# Altium PCB 采集主板V1.1_ZM_20210713.PcbDoc (part 1 of 2)
Units mm, origin at the board's own origin, x right, y up, seen from the top; angles counter-clockwise.
Board outline 130 x 65 mm, 4 copper layers (Top Layer, GND, Power, Bottom Layer), stack 0.778 mm thick; 185 components, 114 nets, 544 pads, 485 vias.
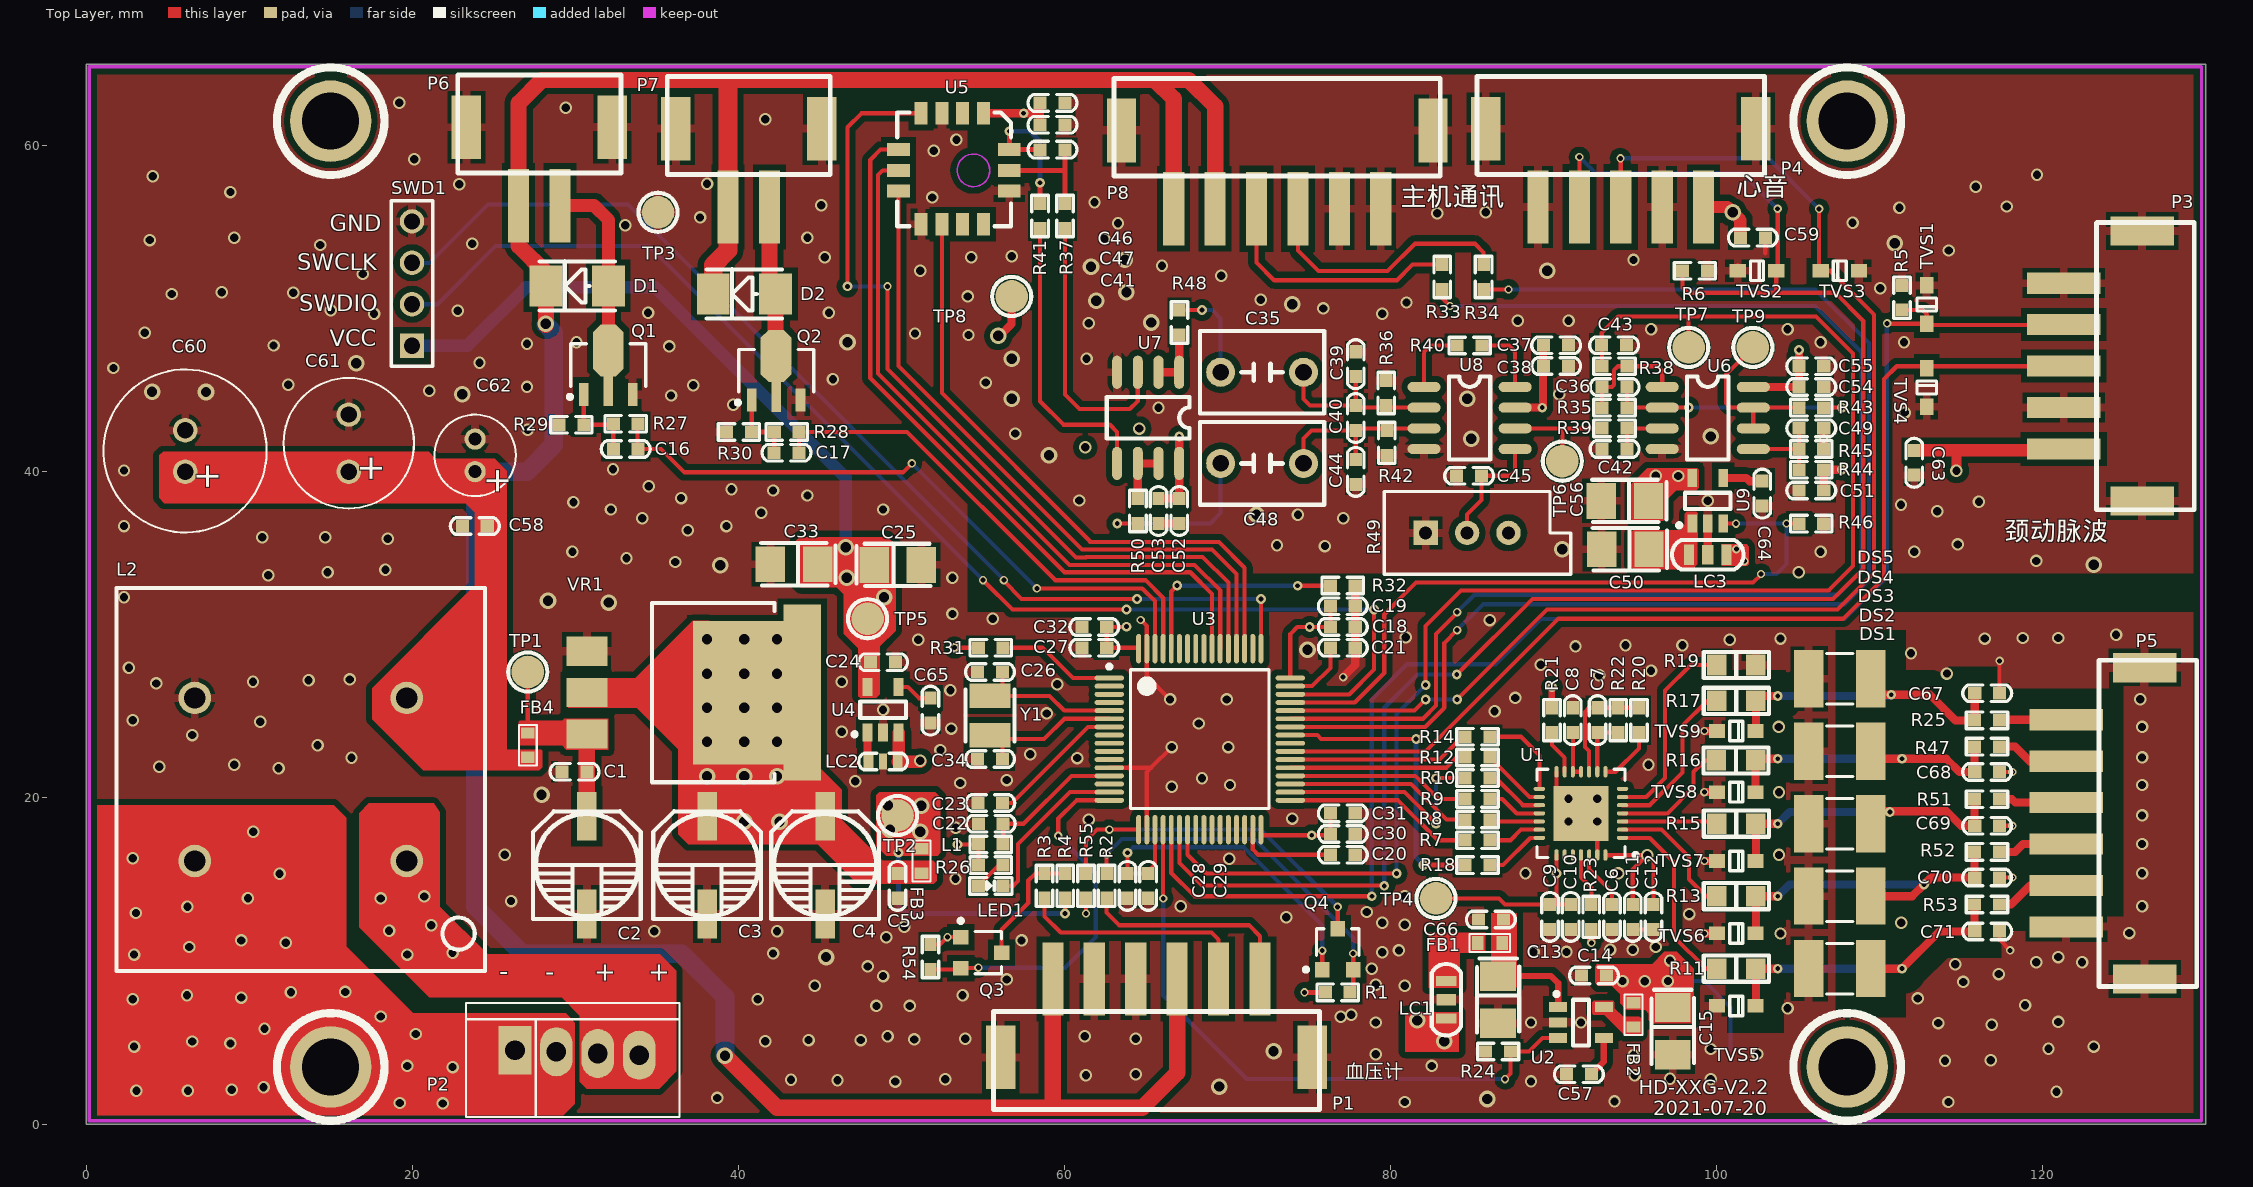
[diagram p0: Top Layer view]
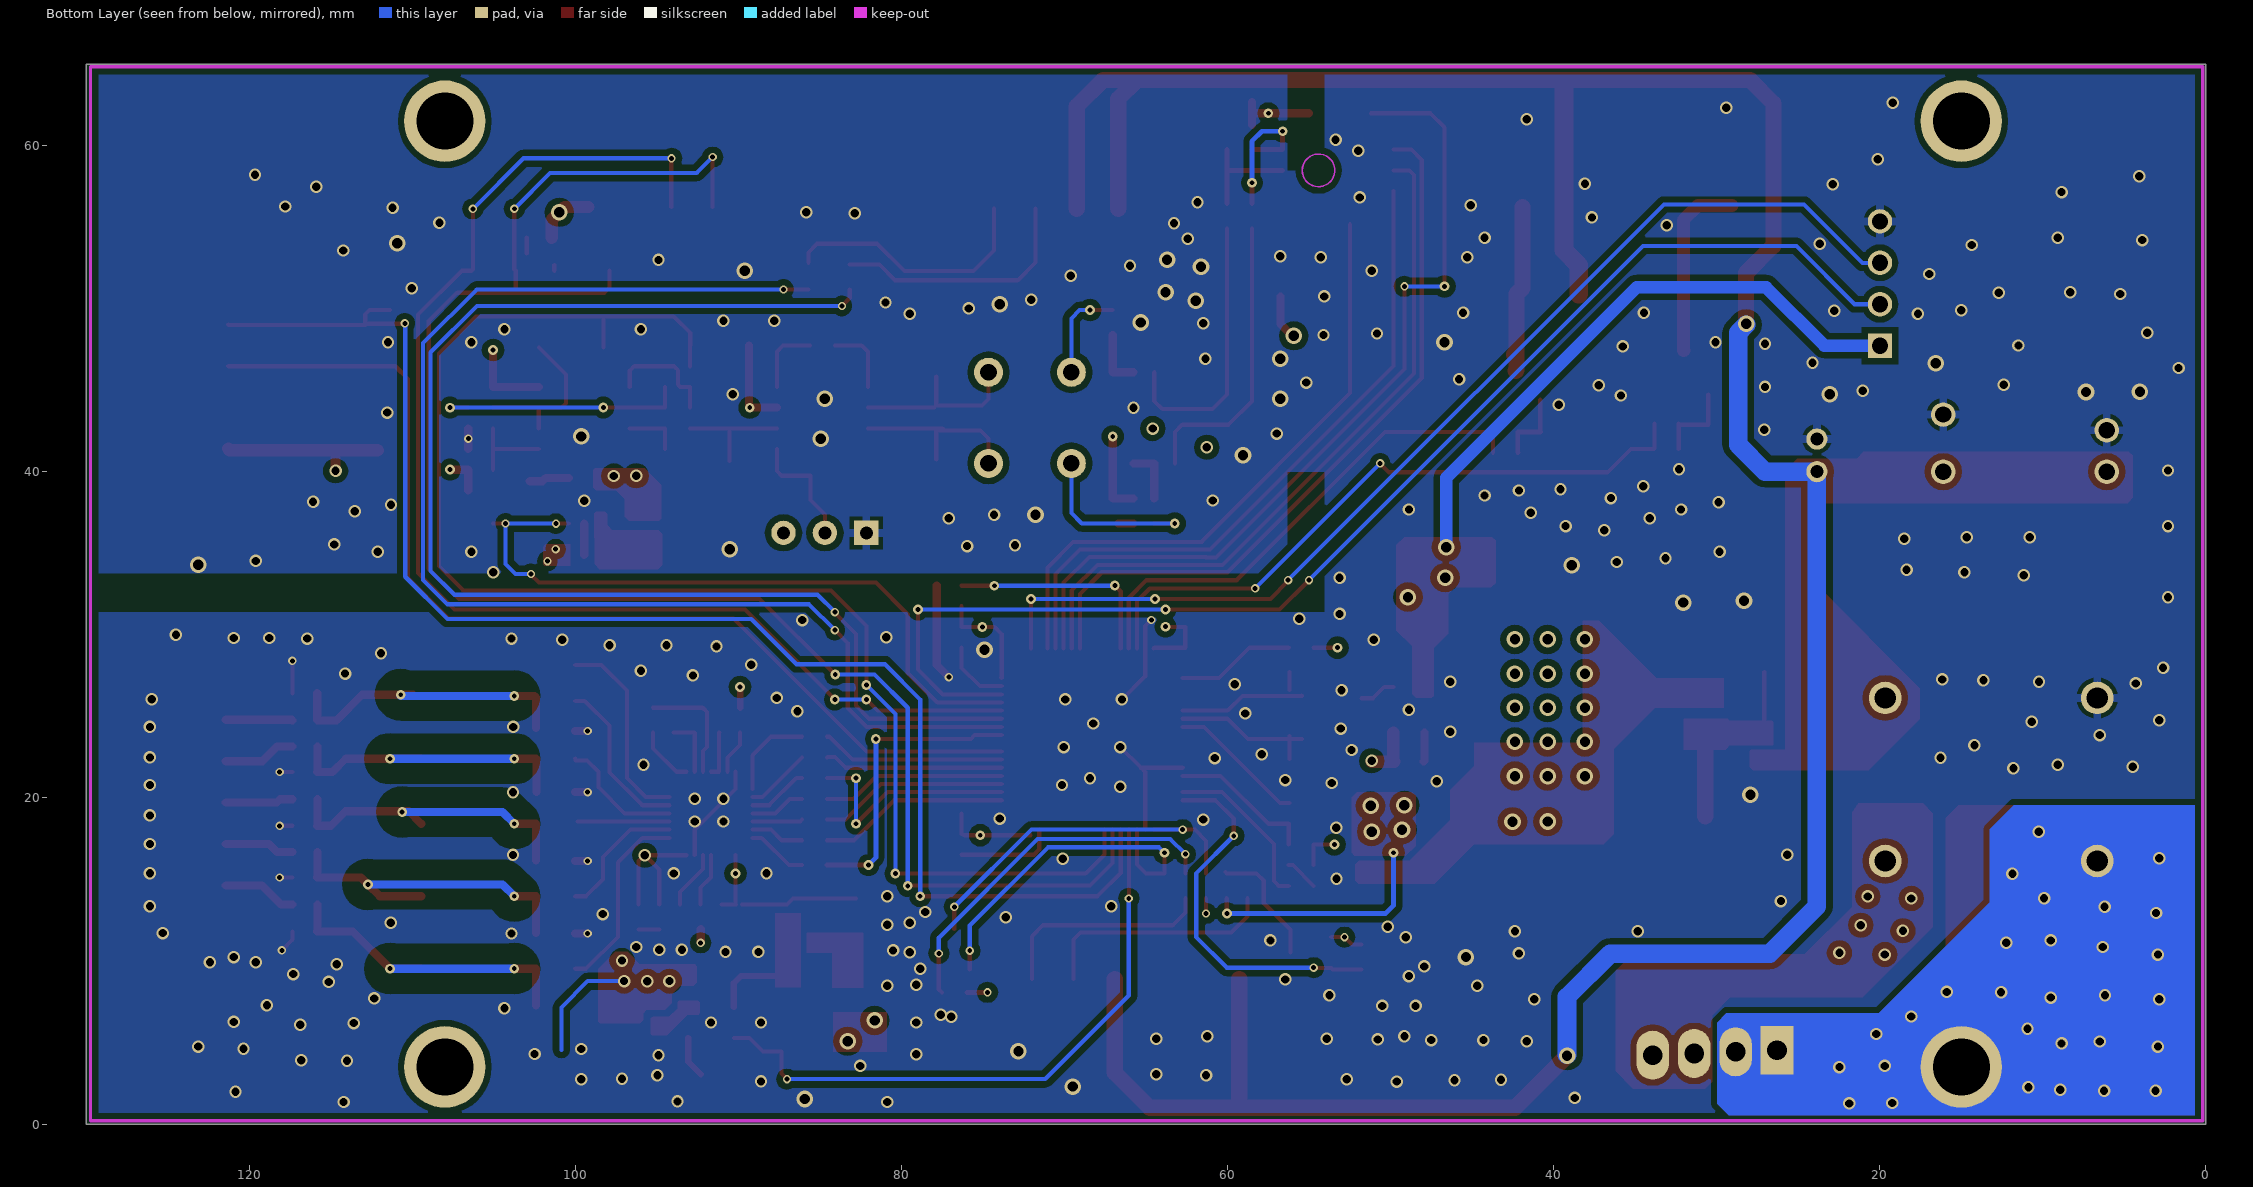
[diagram p1: Bottom Layer view, seen from below]
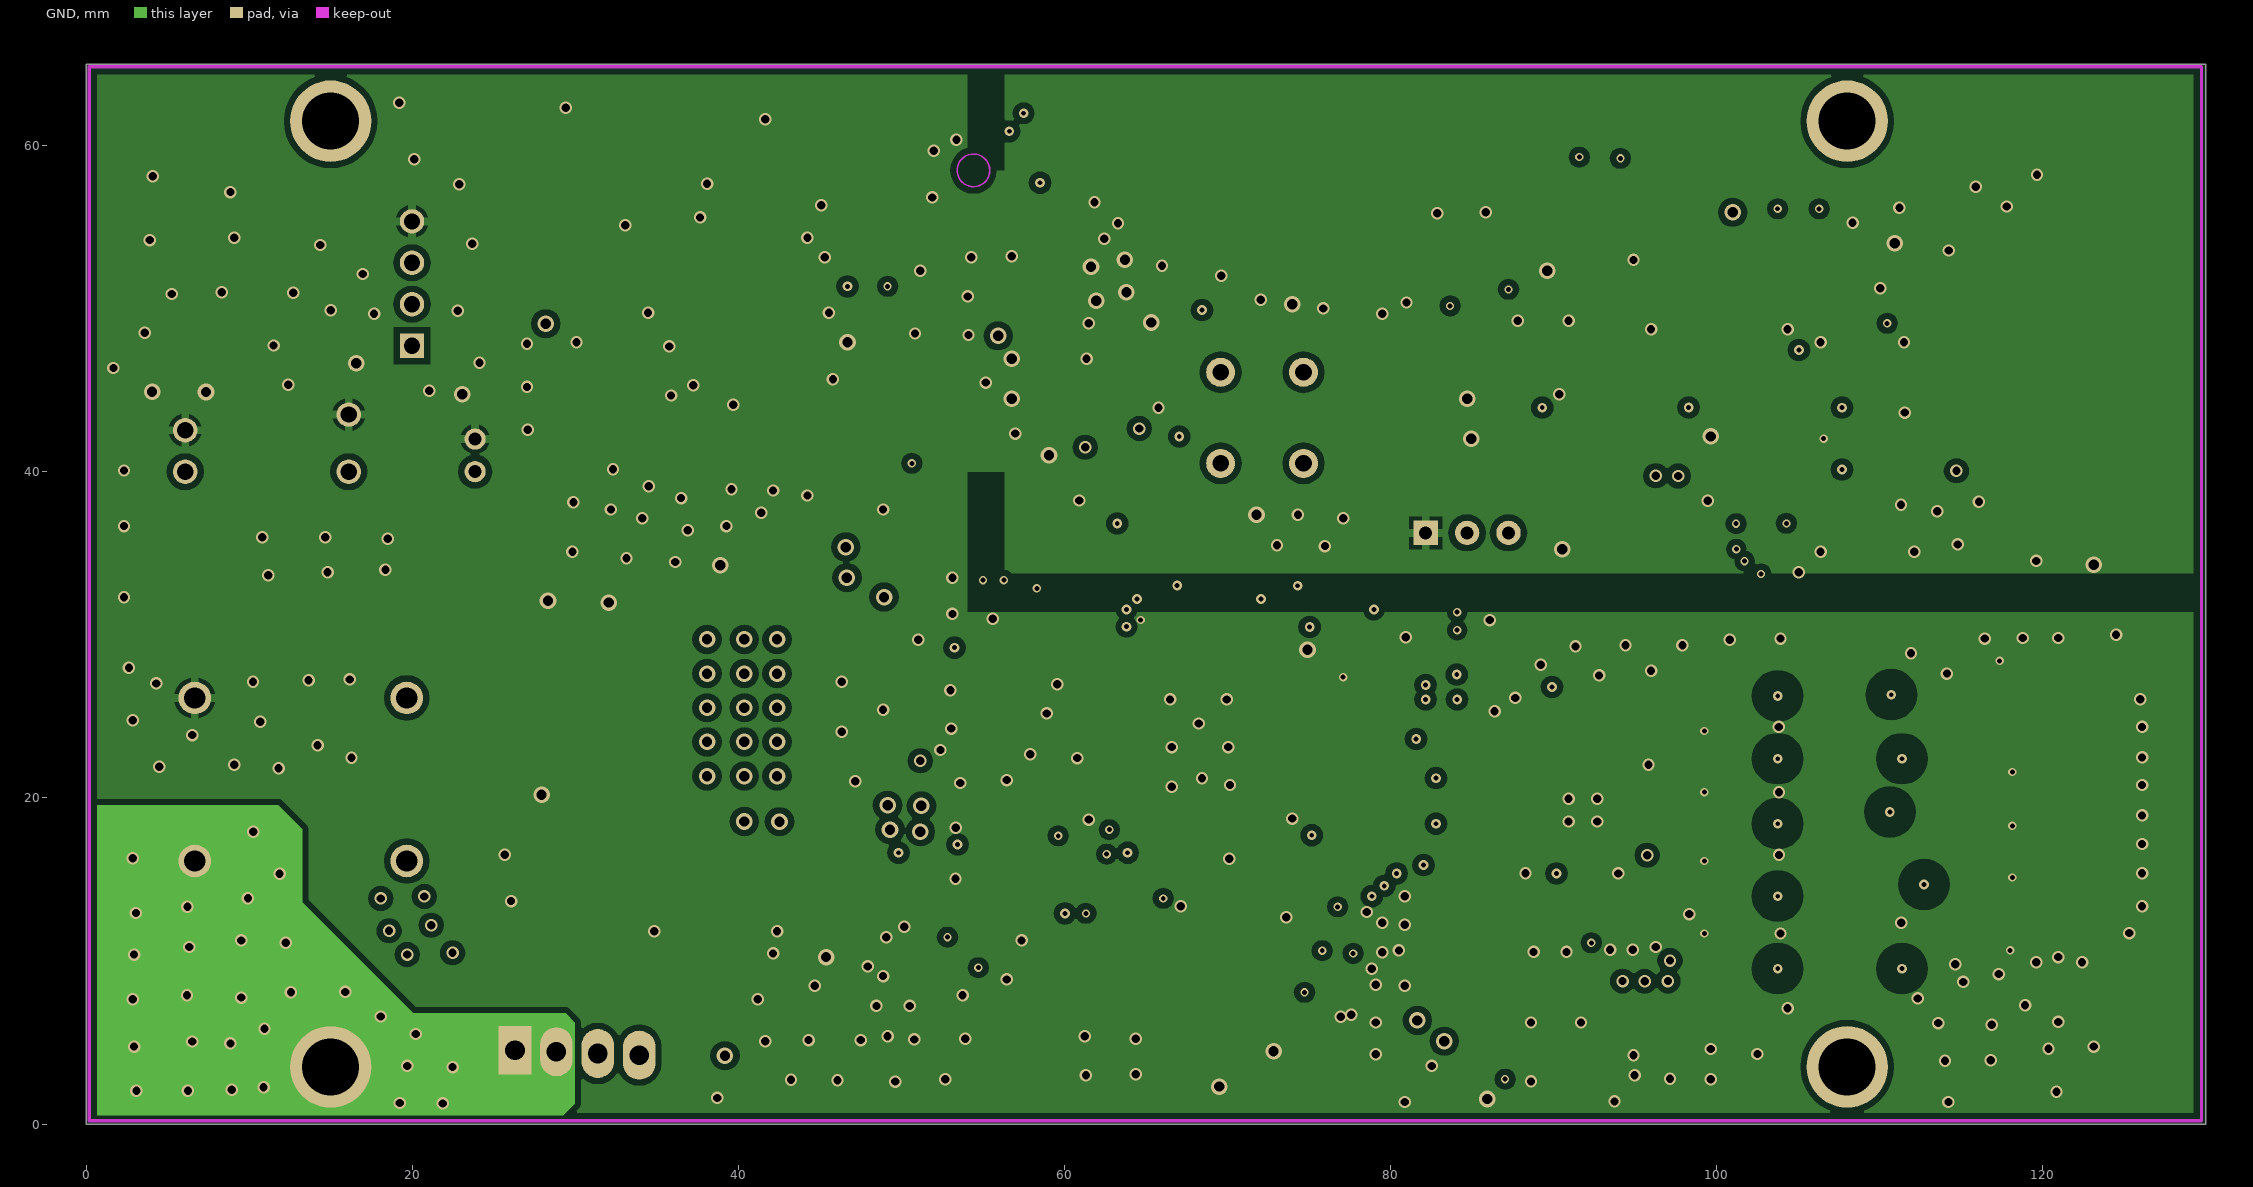
[diagram p2: GND]
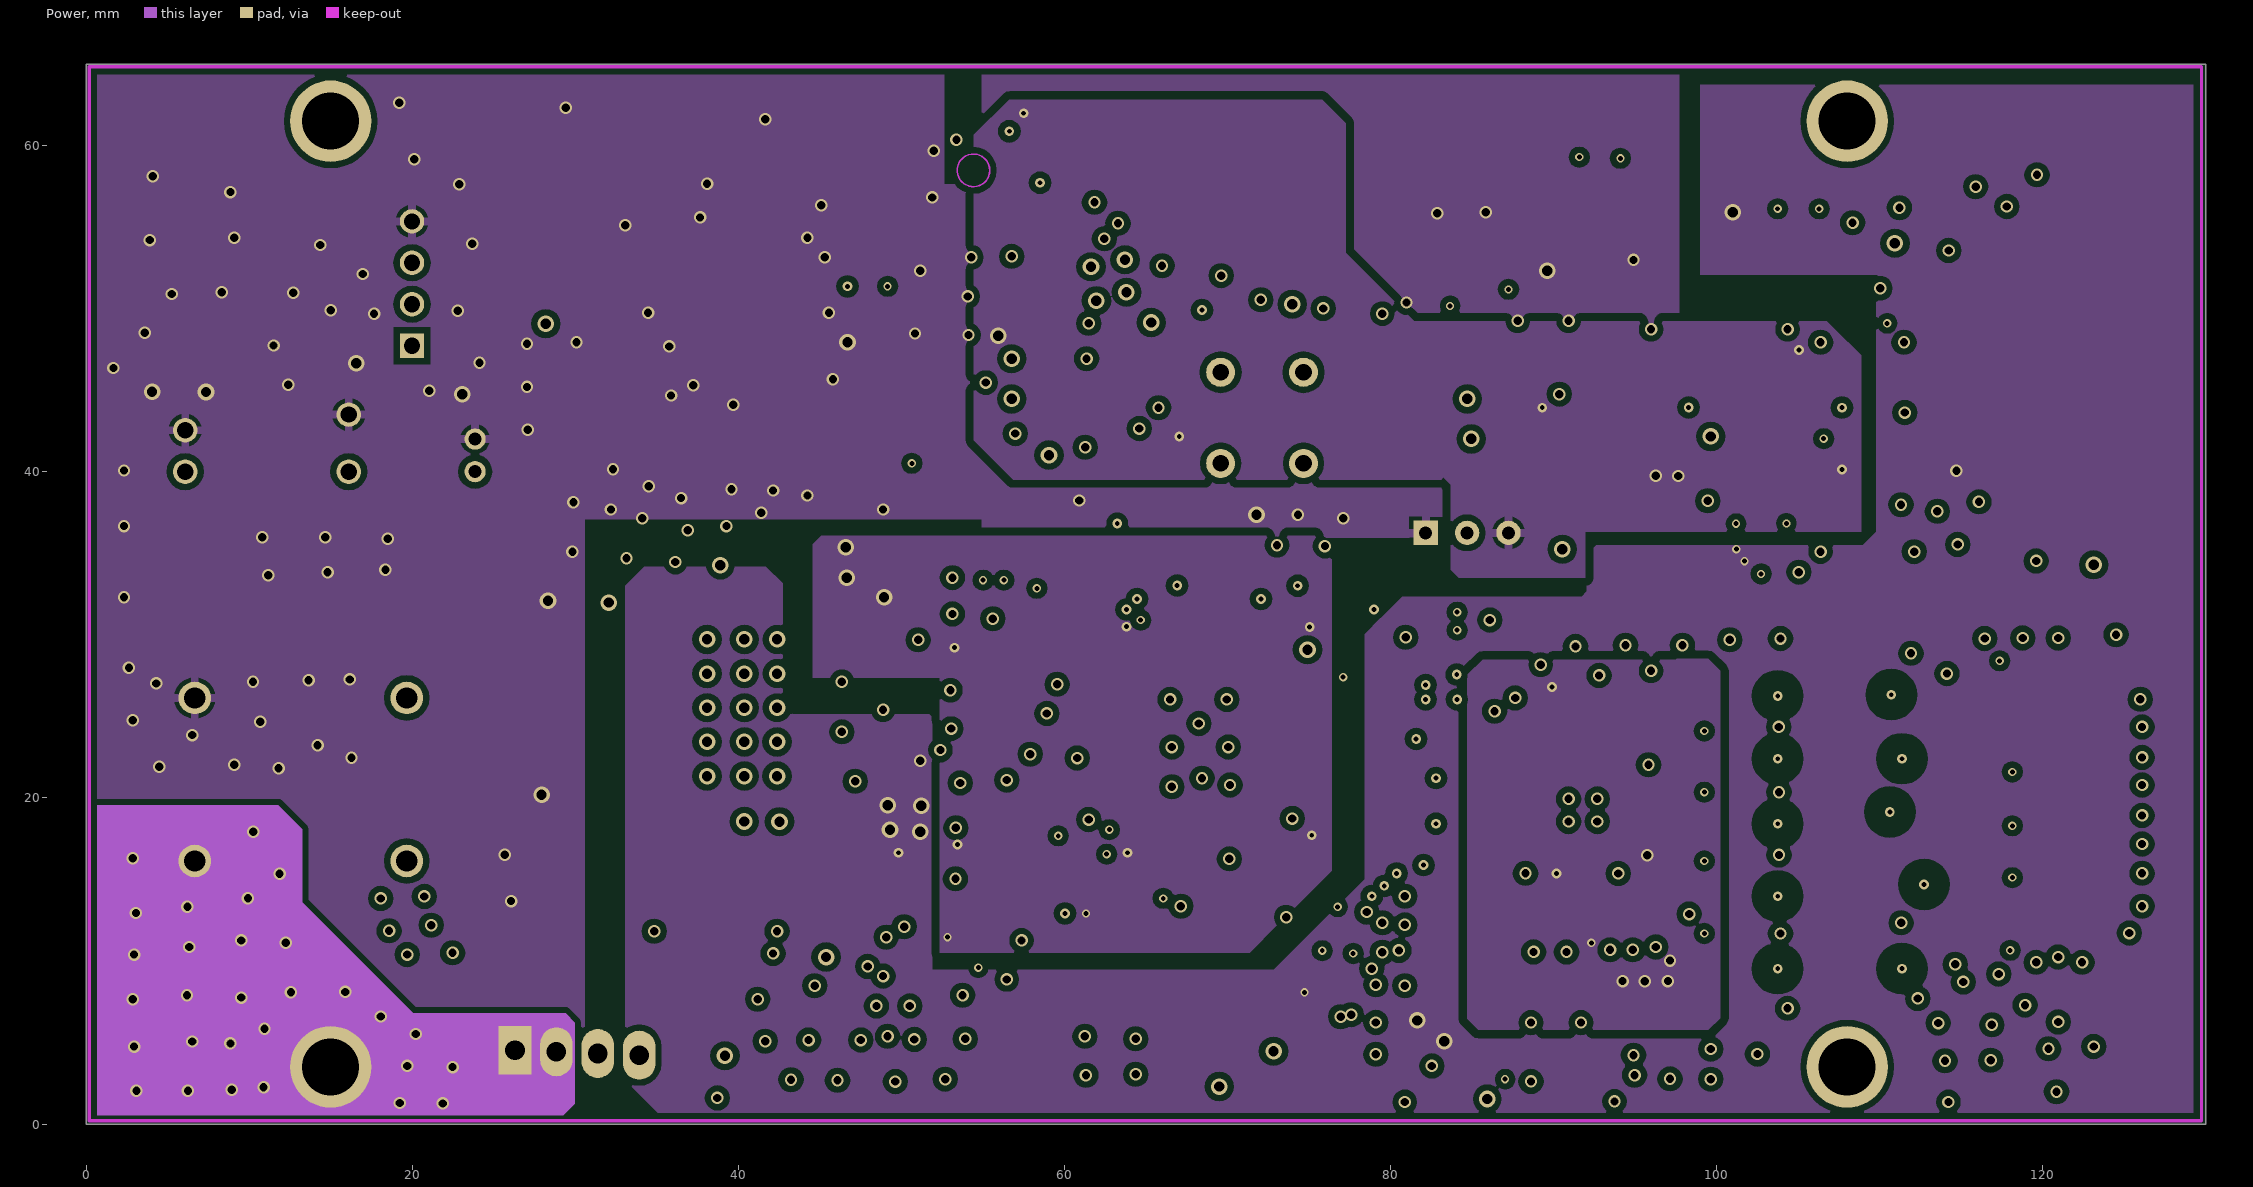
[diagram p3: Power]

## Layer stack, top to bottom
Top Solder: solder mask 0.0102, Solder Resist, Dk 3.5
Top Layer: signal copper 0.0356
Dielectric1: core 0.254, FR-4, Dk 4.2
GND: signal copper 0.036
Dielectric3: prepreg 0.127, Dk 4.2
Power: signal copper 0.036
Dielectric2: core 0.254, Dk 4.2
Bottom Layer: signal copper 0.0356
Bottom Solder: solder mask 0.0102, Solder Resist, Dk 3.5

## Board outline
0,0 130,0 130,65 0,65

## Design rules (kind name [scope] priority, off if disabled: settings)
Clearance ecg [InNetClass('ecg')] p1: gap=0.2 except(1.27: Track-Poly SMDPad-Poly Via-Poly)
Clearance Clearance_1 [InNetClass('ecg')] p2: gap=0.381 except(0.889: Poly-Poly; 1.016: Track-Poly)
Clearance [All] p3: gap=0.2 except(0.381: Arc-Poly Track-Poly SMDPad-Poly THPad-Poly Via-Poly Fill-Poly Poly-Region; 0.508: Poly-Poly)
ComponentClearance [All] p1 off: gap=0.254 collisioncheckmode=3 verticalgap=0.254 showdistances=FALSE
FabricationTestpoint [(IsPad And (OnTopLayer Or OnBottomLayer))] p1: side=3 testpointundercomponent=TRUE minsize=1.016 maxsize=2.54 preferedsize=1.524 minholesize=0 maxholesize=1.016 preferedholesize=0.813 testpointgrid=0.025 allowsidetop=TRUE allowsidebottom=TRUE usegrid=TRUE gridtolerance=0
HoleSize [All] p1: absolutevalues=TRUE maxlimit=10 minlimit=0.025 maxpercent=80.000 minpercent=20.000
PolygonConnect PolygonConnect_1 [isvia] p1: connectstyle=Direct reliefconductorwidth=0.254 reliefentries=4 polygonreliefangle="90 Angle" airgapwidth=0.254
PolygonConnect [All] p2: connectstyle=Relief reliefconductorwidth=0.508 reliefentries=4 polygonreliefangle="90 Angle" airgapwidth=0.254
RoutingVias [All] p1: holewidth=0.3 width=0.6 viastyle="Through Hole" minholewidth=0.1 minwidth=0.3 maxholewidth=0.6 maxwidth=1
SolderMaskExpansion [All] p1: expansion=0.102
Width [All] p1: maxlimit=2 minlimit=0.254 preferedwidth=0.254
27 further rules are at their usual default settings.

## Classes and differential pairs
component class 控制部分: C16 C17 C18 C19 C20 C21 C22 C23 C24 C25 C26 C27 C28 C29 C30 C31 C32 C33 C34 C65 D1 D2 L1 LC2 LED1 P6 P7 P8 Q1 Q2 R26 R27 R28 R29 R30 R31 R32 R33 R34 SWD1 TP5 U3 U4 Y1
component class PRESS: C35 C36 C37 C38 C39 C40 C41 C42 C43 C44 C45 C46 C47 C48 C49 C50 C51 C52 C53 C54 C55 C56 C64 LC3 R35 R36 R37 R38 R39 R40 R41 R42 R43 R44 R45 R46 R48 R49 R50 TP6 TP7 TP8 TP9 U5 U6 U7 U8 U9
component class POWER: C1 C2 C3 C4 C5 C58 C59 C60 C61 C62 C63 FB3 FB4 L2 P1 P2 P3 P4 Q3 Q4 R1 R2 R3 R4 R5 R6 R54 R55 TP1 TP2 TP3 TVS1 TVS2 TVS3 TVS4 VR1
component class ECG: C6 C7 C8 C9 C10 C11 C12 C13 C14 C15 C57 C66 C67 C68 C69 C70 C71 DS1 DS2 DS3 DS4 DS5 FB1 FB2 LC1 P5 R7 R8 R9 R10 R11 R12 R13 R14 R15 R16 R17 R18 R19 R20 R21 R22 R23 R24 R25 R47 R51 R52 R53 TP4 TVS5 TVS6 TVS7 TVS8 TVS9 U1 U2
net class ecg: NetC67_2 NetC68_2 NetC69_2 NetC70_2 NetC71_2 NetP5_1 NetP5_2 NetP5_3 NetP5_4 NetP5_5

## Components (designator, comment, footprint, x,y, rotation, side; value= is the part's Value field where it differs from the comment)
C1 "0.1uF/50V/X5R" SMD-0603C 29.953,21.6 r0 top
C2 "220uF 25V" SMD-6.3*7.7 30.715,15.875 r90 top
C3 "220uF/25V" SMD-6.3*7.7 38.081,15.875 r90 top
C4 "220uF/25V" SMD-6.3*7.7 45.32,15.875 r90 top
C5 "0.1uF/50V/X5R" SMD-0603C 49.765,14.605 r90 top
C6 "1uF/50V/X5R" SMD-0603C 93.58,12.7 r90 top
C7 "1nF 50V" SMD-0603C 92.691,24.765 r90 top
C8 "0.1uF/50V/X5R" SMD-0603C 91.167,24.765 r270 top
C9 "10uF 10V" SMD-0603C 89.77,12.7 r90 top
C10 "0.1uF/50V/X5R" SMD-0603C 91.04,12.7 r90 top
C11 "10uF 10V" SMD-0603C 94.85,12.7 r90 top
C12 "0.1uF/50V/X5R" SMD-0603C 96.12,12.7 r90 top
C13 "100uF 6.3V" SMD-3528-B 86.595,7.62 r270 top
C14 "0.1uF/50V/X5R" SMD-0603C 92.471,9.109 r0 top
C15 "100uF 6.3V" SMD-3528-B 97.301,5.692 r270 top
C16 "1uF/50V/X5R" SMD-0603C 33.093,41.39 r0 top
C17 "1uF/50V/X5R" SMD-0603C 42.954,41.167 r0 top
C18 "1uF/50V/X5R" SMD-0603C 77.07,30.48 r180 top
C19 "0.1uF/50V/X5R" SMD-0603C 77.07,31.75 r180 top
C20 "0.1uF/50V/X5R" SMD-0603C 77.07,16.51 r180 top
C21 "0.1uF/50V/X5R" SMD-0603C 77.07,29.21 r180 top
C22 "0.1uF/50V/X5R" SMD-0603C 55.48,18.415 r0 top
C23 "0.1uF/50V/X5R" SMD-0603C 55.45,19.685 r180 top
C24 "0.1uF/50V/X5R" SMD-0603C 48.876,28.321 r180 top
C25 "100uF 6.3V" SMD-3528-B 49.776,34.29 r0 top
C26 "12P 50V" SMD-0603C 55.43,27.719 r0 top
C27 "1uF/50V/X5R" SMD-0603C 61.83,29.21 r0 top
C28 "0.1uF/50V/X5R" SMD-0603C 63.862,14.605 r90 top
C29 "1uF/50V/X5R" SMD-0603C 65.132,14.605 r90 top
C30 "0.1uF/50V/X5R" SMD-0603C 77.07,17.78 r180 top
C31 "1uF/50V/X5R" SMD-0603C 77.07,19.05 r180 top
C32 "0.1uF/50V/X5R" SMD-0603C 61.83,30.48 r0 top
C33 "100uF 6.3V" SMD-3528-B 43.415,34.33 r180 top
C34 "12P 50V" SMD-0603C 55.43,22.385 r0 top
C35 "0.22uF 63V" CAP-7.5*5.08 72.117,46.101 r0 top
C36 "10pF  50V" SMD-0603C 93.735,45.2 r180 top
C37 "10uF 10V" SMD-0603C 90.151,47.752 r180 top
C38 "0.1uF/50V/X5R" SMD-0603C 90.151,46.482 r180 top
C39 "100pF 50V" SMD-0603C 77.86,46.597 r90 top
C40 "0.01uF/50V/X5R" SMD-0603C 77.86,43.295 r270 top
C41 "0.01uF/50V/X5R" SMD-0603C 59.268,59.752 r0 top
C42 "NC" SMD-0603C 93.735,41.39 r0 top
C43 "NC" SMD-0603C 93.707,47.752 r0 top
C44 "100pF 50V" SMD-0603C 77.86,39.993 r90 top
C45 "0.1uF/50V/X5R" SMD-0603C 84.817,39.751 r0 top
C46 "0.1uF/50V/X5R" SMD-0603C 59.268,62.621 r180 top
C47 "10uF 10V" SMD-0603C 59.268,61.276 r180 top
C48 "0.22uF 63V" CAP-7.5*5.08 72.117,40.513 r180 top
C49 "0.1uF/50V/X5R" SMD-0603C 105.8,42.66 r180 top
C50 "100uF 6.3V" SMD-3528-B 94.4,35.25 r180 top
C51 "0.1uF/50V/X5R" SMD-0603C 105.8,38.85 r0 top
C52 "10uF 10V" SMD-0603C 67.037,37.592 r90 top
C53 "0.1uF/50V/X5R" SMD-0603C 65.767,37.592 r90 top
C54 "10uF 10V" SMD-0603C 105.8,45.2 r180 top
C55 "0.1uF/50V/X5R" SMD-0603C 105.8,46.47 r180 top
C56 "100uF 6.3V" SMD-3528-B 94.37,38.215 r180 top
C57 "0.01uF/50V/X5R" SMD-0603C 91.548,3.048 r0 top
C58 "0.1uF/50V/X5R" SMD-0603C 23.839,36.667 r0 top
C59 "0.1uF/50V/X5R" SMD-0603C 102.216,54.358 r180 top
C60 "1000uF/25V" 10*16 6.077,41.275 r270 top
C61 "470uF/25V" 8*12 16.11,41.755 r270 top
C62 "33uF/25V" 5*7 23.857,41.005 r270 top
C63 "0.1uF/50V/X5R" SMD-0603C 112.108,40.549 r90 top
C64 "NC" SMD-0603C 102.795,38.66 r90 top
C65 "NC" SMD-0603C 51.783,25.35 r90 top
C66 "0.1uF/50V/X5R" SMD-0603C 86.152,12.539 r180 top
C67 "22nF/50V/X5R" SMD-0603C 116.586,26.416 r180 top
C68 "22nF/50V/X5R" SMD-0603C 116.586,21.59 r180 top
C69 "22nF/50V/X5R" SMD-0603C 116.586,18.288 r180 top
C70 "22nF/50V/X5R" SMD-0603C 116.586,15.113 r180 top
C71 "22nF/50V/X5R" SMD-0603C 116.586,11.811 r180 top
D1 "1N4007" DO-214-AC 30.119,51.397 r180 top
D2 "1N4007" DO-214-AC 40.367,50.9 r180 top
DS1 "UN1812-90CSMD" SMD-1812 107.55,9.525 r180 top
DS2 "UN1812-90CSMD" SMD-1812 107.55,13.97 r180 top
DS3 "UN1812-90CSMD" SMD-1812 107.55,18.415 r180 top
DS4 "UN1812-90CSMD" SMD-1812 107.55,22.86 r180 top
DS5 "UN1812-90CSMD" SMD-1812 107.55,27.305 r180 top
FB1 "30R/5A" 0603r 85.335,11.095 r0 top
FB2 "30R/5A" 0603r 94.896,5.946 r90 top
FB3 "30R/5A" 0603r 51.226,15.373 r90 top
FB4 "30R/5A" 0603r 27.087,22.479 r90 top
L1 "MPZ1608D101BTA00" SMD-0603 55.48,17.145 r180 top
L2 "LCM" LCM 19.666,16.129 r180 top
LC1 "NFM18PC104R1C3" NFM21P-0805 83.42,7.62 r270 top
LC2 "NFM18PC104R1C3" NFM18P-0603 48.876,22.225 r0 top
LC3 "NFM18PC104R1C3" NFM21P-0805 99.45,34.913 r0 top
LED1 "蓝" SMD-0603D 55.48,14.605 r0 top
P1 "XH2.54 6P 立贴" XH-2.54-6P-LI 65.64,8.89 r180 top
P2 "XH2.54-4P直插" 4X2.54MMZ 26.305,4.524 r0 top
P3 "XH2.54 6P 立贴" XH-2.54-5P-LI 121.285,46.482 r270 top
P4 "XH2.54 5P 立贴" XH-2.54-5P-LI 94.116,56.236 r0 top
P5 "XH2.54 6P 立贴" XH-2.54-6P-LI 121.438,18.44 r270 top
P6 "VH2.54-2P" XH-2.54-2P-LI 27.794,56.321 r0 top
P7 "VH2.54-2P" XH-2.54-2P-LI 40.639,56.236 r0 top
P8 "XH2.54 6P 立贴" XH-2.54-6P-LI 73.047,56.127 r0 top
Q1 "D882M" SOT-89-3 32.022,46.542 r0 top
Q2 "D882M" SOT-89-3 42.319,46.193 r0 top
Q3 "S8050" SOT-23 54.89,10.51 r270 top
Q4 "S8050" SOT-23 76.758,10.716 r0 top
R1 "10K" SMD-0603 76.758,8.071 r0 top
R2 "20R" SMD-0603 62.587,14.605 r90 top
R3 "20R" SMD-0603 58.777,14.605 r90 top
R4 "10K" SMD-0603 60.047,14.605 r270 top
R5 "10K" SMD-0603 111.36,50.673 r270 top
R6 "10K" SMD-0603 98.66,52.324 r180 top
R7 "33R" SMD-0603 85.325,17.399 r0 top
R8 "33R" SMD-0603 85.325,18.669 r0 top
R9 "33R" SMD-0603 85.325,19.939 r0 top
R10 "33R" SMD-0603 85.325,21.209 r0 top
R11 "0R" SMD-0805 101.2,9.525 r180 top
R12 "33R" SMD-0603 85.325,22.479 r0 top
R13 "0R" SMD-0805 101.2,13.97 r180 top
R14 "33R" SMD-0603 85.325,23.749 r0 top
R15 "0R" SMD-0805 101.2,18.415 r180 top
R16 "0R" SMD-0805 101.18,22.3 r180 top
R17 "0R" SMD-0805 101.2,25.95 r180 top
R18 "33R" SMD-0603 85.325,15.875 r0 top
R19 "0R" SMD-0805 101.2,28.15 r180 top
R20 "10K" SMD-0603 95.231,24.765 r90 top
R21 "1M" SMD-0603 89.897,24.765 r270 top
R22 "10M" SMD-0603 93.961,24.765 r90 top
R23 "1M" SMD-0603 92.31,12.7 r90 top
R24 "10K" SMD-0603 86.595,4.445 r180 top
R25 "15K" SMD-0603 116.575,24.754 r180 top
R26 "4.7K" SMD-0603 55.48,15.875 r0 top
R27 "100R" SMD-0603 33.093,42.943 r0 top
R28 "100R" SMD-0603 42.964,42.437 r0 top
R29 "10K" SMD-0603 29.76,42.886 r180 top
R30 "10K" SMD-0603 40.033,42.437 r180 top
R31 "100K" SMD-0603 55.48,29.21 r0 top
R32 "10K" SMD-0603 77.07,33.02 r0 top
R33 "10R" SMD-0603 83.166,51.943 r270 top
R34 "10R" SMD-0603 85.706,51.943 r270 top
R35 "100K" SMD-0603 93.735,43.93 r180 top
R36 "4.7M" SMD-0603 79.737,44.831 r90 top
R37 "10K" SMD-0603 60.03,55.688 r90 top
R38 "1K" SMD-0603 93.735,46.47 r180 top
R39 "10K" SMD-0603 93.735,42.66 r0 top
R40 "1K" SMD-0603 84.845,47.74 r0 top
R41 "10K" SMD-0603 58.506,55.688 r90 top
R42 "4.7M" SMD-0603 79.765,41.771 r90 top
R43 "3.3K" SMD-0603 105.8,43.93 r0 top
R44 "10K" SMD-0603 105.8,40.12 r180 top
R45 "10K" SMD-0603 105.8,41.39 r180 top
R46 "10K" SMD-0603 105.8,36.818 r0 top
R47 "15K" SMD-0603 116.575,23.141 r180 top
R48 "10K" SMD-0603 67.05,49.149 r270 top
R49 "20K" VR-05 84.69,36.25 r0 top
R50 "10K" SMD-0603 64.5,37.592 r90 top
R51 "15K" SMD-0603 116.575,19.914 r180 top
R52 "15K" SMD-0603 116.575,16.688 r180 top
R53 "15K" SMD-0603 116.575,13.462 r180 top
R54 "10K" SMD-0603 51.783,10.239 r90 top
R55 "10K" SMD-0603 61.317,14.605 r90 top
SWD1 "SIP-4" SIP-4 19.988,51.542 r90 top
TP1 "TP" TP 27.087,27.719 r0 top
TP2 "TP" TP 49.765,18.923 r0 top
TP3 "TP" TP 35.076,55.908 r0 top
TP4 "TP" TP 82.785,13.835 r0 top
TP5 "TP" TP 47.926,30.988 r270 top
TP6 "TP" TP 90.532,40.65 r0 top
TP7 "TP" TP 98.279,47.625 r0 top
TP8 "TP" TP 56.762,50.753 r0 top
TP9 "TP" TP 102.216,47.625 r90 top
TVS1 "TVS-S" SOD-323 112.884,50.255 r270 top
TVS2 "TVS-S" SOD-323 102.47,52.324 r0 top
TVS3 "TVS-S" SOD-323 107.55,52.324 r180 top
TVS4 "TVS-S" SOD-323 112.884,45.163 r90 top
TVS5 "TVS-S" SOD-323 101.2,7.239 r0 top
TVS6 "TVS-S" SOD-323 101.2,11.684 r0 top
TVS7 "TVS-S" SOD-323 101.2,16.129 r0 top
TVS8 "TVS-S" SOD-323 101.2,20.35 r0 top
TVS9 "TVS-S" SOD-323 101.2,24.1 r0 top
U1 "ADS1293CISQ/NOPB" QFN-28 91.675,19.05 r0 top
U2 "TPS73633DBVR" SOT23-5 91.675,6.223 r0 top
U3 "STM32F405RGT6" LQFP64_N 68.3,23.6 r0 top
U4 "LP5907MFX-3.3" SOT23-5 48.876,25.4 r90 top
U5 "MMR901XA" MMR901XA 52.918,58.482 r180 top
U6 "OPA2376AID" SOIC-8 99.45,43.295 r0 top
U7 "OPA2376AID" SOIC-8 65.132,43.307 r270 top
U8 "AD623AR" SOIC-8 84.845,43.295 r0 top
U9 "LP5907MFX-3.3" SOT23-5 99.45,38.215 r90 top
VR1 "LM1085S-5.0V" TO-263-3 30.715,26.461 r270 top
Y1 "8MHz" XTAL-3225-2 55.43,25.052 r90 top

## Footprints (in the part's own frame and the unit in brackets; to place one, negate y for a bottom-side part, rotate by r counter-clockwise, add the part's x,y. Pads: shape width x height; smd on the part's side, far side on the other; paste and mask are expansions set on the pad)
4X2.54MMZ [mm] "接插件2.54-3P"
  rect 2x3 hole 1.2: 1(0,0)
  oval 2x3 hole 1.2: 2(2.54,-0.1) 3(5.08,-0.2) 4(7.62,-0.3)
  silkscreen extent -3,-4.1 10.08,2.9
5*7 [mm]
  round 1.3 hole 0.8: 1(1,0) 2(-1,0)
  silkscreen extent -2.5,-2.5 2.5,2.5
8*12 [mm]
  round 1.5 hole 1: 1(1.75,0) 2(-1.75,0)
  silkscreen extent -4,-4 4,4
10*16 [mm]
  round 1.5 hole 1: 1(1.27,0) 2(-1.27,0)
  silkscreen extent -5,-5 5,5
0603r [mm]
  rect 0.7x0.85 smd: 1(0,0) 2(1.5,0)
  silkscreen extent -0.5,-0.55 2,0.55
CAP-7.5*5.08 [mil]
  round 70 hole 40: 1(-100,0) 2(100,0)
  silkscreen extent -150,-100 150,100
DO-214-AC [mm] "Molded Diode, 2-Leads, Body 4.5x2.6mm, IPC Medium Density"
  rect 2x2.5 smd: 1(-1.915,0) 2(1.915,0)
  silkscreen extent -2.3,-1.52 2.3,1.5, body extent -2.3,-1.35 2.3,1.35, height 2.4
LCM [mm]
  round 2 hole 1.3: 1(0,0) 2(0,-10) 3(13,-10) 4(13,0)
  silkscreen extent -4.8,-16.75 17.8,6.75
LQFP64_N [mm] "Thin QFP, 64-Leads, Body 10x10mm, Pitch 0.5mm, IPC Medium Density"
  oval 1.8x0.3 smd: 1(-5.55,3.75) 2(-5.55,3.25) 3(-5.55,2.75) 4(-5.55,2.25) 5(-5.55,1.75) 6(-5.55,1.25) 7(-5.55,0.75) 8(-5.55,0.25) 9(-5.55,-0.25) 10(-5.55,-0.75) 11(-5.55,-1.25) 12(-5.55,-1.75) 13(-5.55,-2.25) 14(-5.55,-2.75) 15(-5.55,-3.25) 16(-5.55,-3.75) 33(5.55,-3.75) 34(5.55,-3.25) 35(5.55,-2.75) 36(5.55,-2.25) 37(5.55,-1.75) 38(5.55,-1.25) 39(5.55,-0.75) 40(5.55,-0.25) 41(5.55,0.25) 42(5.55,0.75) 43(5.55,1.25) 44(5.55,1.75) 45(5.55,2.25) 46(5.55,2.75) 47(5.55,3.25) 48(5.55,3.75)
  oval 0.3x1.8 smd: 17(-3.75,-5.55) 18(-3.25,-5.55) 19(-2.75,-5.55) 20(-2.25,-5.55) 21(-1.75,-5.55) 22(-1.25,-5.55) 23(-0.75,-5.55) 24(-0.25,-5.55) 25(0.25,-5.55) 26(0.75,-5.55) 27(1.25,-5.55) 28(1.75,-5.55) 29(2.25,-5.55) 30(2.75,-5.55) 31(3.25,-5.55) 32(3.75,-5.55) 49(3.75,5.55) 50(3.25,5.55) 51(2.75,5.55) 52(2.25,5.55) 53(1.75,5.55) 54(1.25,5.55) 55(0.75,5.55) 56(0.25,5.55) 57(-0.25,5.55) 58(-0.75,5.55) 59(-1.25,5.55) 60(-1.75,5.55) 61(-2.25,5.55) 62(-2.75,5.55) 63(-3.25,5.55) 64(-3.75,5.55)
  silkscreen extent -5.67,-4.25 4.25,4.57, body extent -5,-5 5,5, height 1.6
MMR901XA [mm] "传感器"
  rect 0.8x1.4 smd: 1(-2.105,-3.5) 2(-0.835,-3.5) 3(0.435,-3.5) 4(1.705,-3.5) 8(1.705,3.3) 9(0.435,3.3) 10(-0.835,3.3) 11(-2.105,3.3)
  rect 1.4x0.8 smd: 5(3.1,-1.27) 6(3.1,0) 7(3.1,1.27) 12(-3.7,1.27) 13(-3.7,0) 14(-3.7,-1.27)
  Keep-Out Layer circle w0.1: c-1.5,0 r1
  silkscreen extent -3.81,-3.56 3.18,3.43
NFM18P-0603 [mm] "三端滤波电容"
  rect 0.6x0.8 smd: 1(-0.9,0) 3(0.9,0)
  rect 0.5x1 smd: 2(0,0)
  silkscreen extent -1.5,-0.51 1.5,0.51
NFM21P-0805 [mm] "三端滤波电容"
  rect 0.6x1.27 smd: 1(-1.143,0) 3(1.143,0)
  rect 0.7x1.2 smd: 2(0,0)
  silkscreen extent -2.2,-0.9 2.2,0.9, body extent -1,-0.62 1,0.63, height 0.85
QFN-28 [mm]
  rect 3.38x3.38 smd: 0(0,0)
  oval 0.7x0.25 smd: 1(2.55,-1.5) 2(2.55,-1) 3(2.55,-0.5) 4(2.55,0) 5(2.55,0.5) 6(2.55,1) 7(2.55,1.5) 15(-2.55,1.5) 16(-2.55,1) 17(-2.55,0.5) 18(-2.55,0) 19(-2.55,-0.5) 20(-2.55,-1) 21(-2.55,-1.5)
  oval 0.25x0.7 smd: 8(1.5,2.55) 9(1,2.55) 10(0.5,2.55) 11(0,2.55) 12(-0.5,2.55) 13(-1,2.55) 14(-1.5,2.55) 22(-1.5,-2.55) 23(-1,-2.55) 24(-0.5,-2.55) 25(0,-2.55) 26(0.5,-2.55) 27(1,-2.55) 28(1.5,-2.55)
  silkscreen extent -2.7,-2.7 3.48,2.7, body extent -2.55,-2.55 2.55,2.55, height 1
SIP-4 [mm]
  rect 1.5x1.5 hole 1: 1(-3.81,0)
  round 1.5 hole 1: 2(-1.27,0) 3(1.27,0) 4(3.81,0)
  silkscreen extent -5.08,-1.27 5.08,1.27
SMD-6.3*7.7 [mm] "35V 100uF"
  rect 3x1.2 smd: 1(3,0) 2(-3,0)
  silkscreen extent -3.3,-3.3 3.3,3.3, body extent -3.37,-3.42 3.13,3.08, height 9.7
SMD-0603 [mil] "W1/32贴片电阻"
  rect 31.5x30 smd: 1(-30,0) 2(30,0)
  silkscreen extent -50,-20 50,20, body extent -31,-16 32,16, height 18
SMD-0603C [mil] "贴片电容"
  rect 31.5x30 smd: 1(-30,0) 2(30,0)
  silkscreen extent -59,-20 59,20, body extent -31,-16 32,16
SMD-0603D [mil] "贴片二极管"
  rect 31.5x30 smd: 1(-30,0) 2(30,0)
  silkscreen extent -51,-20 51,20, body extent -31,-16 32,16, height 26
SMD-0805 [mm] "贴片电阻"
  rect 1.2x1.27 smd: 1(-1.2,0) 2(1.2,0)
  silkscreen extent -2,-0.8 2,0.8, body extent -1,-0.63 1,0.63, height 0.55
SMD-1812 [mm] "贴片电阻"
  rect 1.8x3.5 smd: 1(-1.9,0) 2(1.9,0)
  silkscreen extent -0.8,-1.55 0.8,1.55, body extent -2.4,-1.7 2.4,1.7, height 1.4
SMD-3528-B [mm] "Molded Capacitor, 2-Leads, Body 3.5x2.2mm, IPC Medium Density"
  rect 1.8x2.2 smd: 1(-1.45,0) 2(1.45,0)
  silkscreen extent -2.54,-1.3 2.01,1.3, body extent -1.85,-1.46 1.85,1.47, height 2.03
SOD-323 [mm] "贴片二极管"
  rect 1x0.83 smd: 1(-1.18,0) 2(1.18,0)
  silkscreen extent -0.4,-0.6 0.4,0.6, body extent -1.4,-0.68 1.4,0.67, height 0.75
SOIC-8 [mil] "中体积贴片"
  oval 80x24 smd: 1(-110,75) 2(-110,25) 3(-110,-25) 4(-110,-75) 5(110,-75) 6(110,-25) 7(110,25) 8(110,75)
  silkscreen extent -50,-100 50,100, body extent -119,-99 119,99, height 63
SOT23-5 [mm] "SOT23, 5-Leads, Body 3.1x2.6mm (max), Pitch 0.95mm, IPC Medium Density"
  rect 1.1x0.6 smd: 1(-1.4,0.95) 2(-1.4,0) 3(-1.4,-0.95) 4(1.4,-0.95) 5(1.4,0.95)
  silkscreen extent -1.62,-1.4 0.5,1.87, body extent -1.25,-1.5 1.25,1.5, height 1.1
SOT-23 [mm] "SOT-23; 3 Leads; Body 3.0 x 2.6 mm, inc. leads (LxW max)"
  rect 0.9x0.95 smd: 1(-0.95,-1.25) 2(0.95,-1.25) 3(0,1.25)
  silkscreen extent -2.07,-1.37 1.3,1.25
SOT-89-3 [mm] "三极管或MOS"
  rect 0.6x1.4 smd: 1(-1.5,-1.8) 3(1.5,-1.8)
  rect 0.6x2 smd: 2(0,-1.524)
  oct 1.9x3.2 smd: 2(0,0.9)
  silkscreen extent -2.47,-2.07 2.3,1.3, body extent -2.25,-2.1 2.25,2.2, height 1.51
TO-263-3 [mm]
  rect 1.8x2.5 smd: 1(-2.54,0) 2(0,0) 3(2.54,0)
  rect 10.8x2.3 smd: 2(0,13.208)
  rect 8.8x6 smd: 2(0,9.5)
  silkscreen extent -5.5,4 5.5,11.5
TP [mm] "Test Point"
  round 2 smd: 1(0,0)
  silkscreen extent -1.2,-1.2 1.2,1.2
VR-05 [mm] "立式精密变阻器"
  rect 1.5x1.5 hole 0.8: 1(-2.54,0)
  round 1.5 hole 0.8: 2(0,0) 3(2.54,0)
  silkscreen extent -5.08,-2.54 6.35,2.54
XH-2.54-2P-LI [mm] "接插件2.54-2P"
  rect 1.8x3.9 smd: 0(-4.47,4.8) 0(4.47,4.8)
  rect 1.3x4.5 smd: 1(-1.27,0) 2(1.27,0)
  silkscreen extent -5,2 5,8
XH-2.54-5P-LI [mm] "接插件2.54-3P"
  rect 1.8x3.9 smd: 0(-8.28,4.8) 0(8.28,4.8)
  rect 1.3x4.5 smd: 1(-5.08,0) 2(-2.54,0) 3(0,0) 4(2.54,0) 5(5.08,0)
  silkscreen extent -8.81,2 8.81,8, body extent -6.25,-0.89 6.25,8.01
XH-2.54-6P-LI [mm] "接插件2.54-6P"
  rect 1.8x3.9 smd: 0(-9.55,4.8) 0(9.55,4.8)
  rect 1.3x4.5 smd: 1(-6.35,0) 2(-3.81,0) 3(-1.27,0) 4(1.27,0) 5(3.81,0) 6(6.35,0)
  silkscreen extent -10,2 10,8, body extent -6.25,-0.89 6.25,8.01
XTAL-3225-2 [mm] "3225晶振两脚"
  rect 1.5x2.5 smd: 1(-1.2,0) 2(1.2,0)
  silkscreen extent -1.6,-1.5 1.6,1.5, body extent -1.6,-1.25 1.6,1.25, height 0.9

## Part data
C1 C5 C9 C11 C16 C17 C18 C19 C20 C21 C22 C23 C26 C27 C28 C29 C30 C31 C32 C34 C47 C52 C54 C58 C59 C63: library part CAP4, "贴片电容 20%"
C2 C3 C4 C60 C61 C62: library part CAP2, "电解电容"
C6 C8 C10 C12 C14 C41 C46 C51 C53 C55 C57 C64 C65 C66 C67 C68 C69 C70 C71: library part CAP4, "贴片电容 10%"
C7: library part CAP4, "贴片电容 5%"
C13 C15 C25 C33 C50 C56: library part CAP2, "钽电容"
C24: library part CAP4, "贴片电容"
C35 C48: library part CAP, "CBB电容"
C36 C38 C39 C40 C42 C43 C44 C45 C49: library part CAP, "贴片电容 5%"
C37: library part CAP, "贴片电容 20%"
D1 D2: library part DIODE2, "二极管 M7"
DS1 DS2 DS3 DS4 DS5: library part DISCHARE-1, "气体放电管 90V"
FB1 FB2 FB3 FB4: library part Inductor, "Inductor"
L1: library part CIZHU1, "磁珠电感 100R 100MHz"
LC1 LC2 LC3: library part SMD-EMIFIL-0603, "LC滤波器"
LED1: library part LED0, "LED"
P1 P8: library part SIP-6, "血压计接口"
P2: library part SIP-4
P3: library part SIP-5, "颈动脉传感器接口"
P4: library part SIP-5, "心音传感器接口"
P5: library part SIP-6, "心电接口"
P6 P7: library part SIP-2, "2.54mm- 2P立贴"
Q1 Q2: library part NPN-TO252, "NPN TO252"
Q3 Q4: library part NPN-1, "NPN"
R1 R2 R3 R4 R5 R6 R54 R55: library part R, "贴片电阻 1%"
R7 R8 R9 R10 R11 R12 R13 R14 R15 R16 R17 R18 R19 R21 R23: library part RES0, "贴片电阻 5%"
R20 R22 R24 R25 R35 R36 R37 R38 R39 R40 R41 R42 R43 R46 R47 R48 R50 R51 R52 R53: library part RES0, "贴片电阻 1%"
R26: library part RES2, "贴片电阻"
R27 R28 R29 R30: library part RES-SOP, "贴片电阻 5%"
R31 R32 R33 R34: library part RES2, "贴片电阻 5%"
R44 R45: library part RES0, "贴片电阻 1% 低温票电阻"
R49: library part RES4, "可调电阻"
TP1 TP3: library part TP-1, "测试点"
TP2: library part TP_POINT, "测试点"
TP4 TP5 TP6 TP7 TP8 TP9: library part TP_POINT
TVS1 TVS2 TVS3 TVS4 TVS5 TVS6 TVS7 TVS8 TVS9: "单向TVS"
U1: library part ADS1293, "ECG AFE"
U2 U4 U9: library part MCP1802, "LDO"
U3: library part STM32F405RG, "MCU"
U5: library part MMR901, "压力传感器"
U6: library part LM358, "运放"
U7: library part LM358, "高精度运放"
U8: library part Component_1, "仪表运放"
VR1: library part LM1117, "三端稳压器"
Y1: library part XTAL, "晶振"

## Free pads (board coordinates)
  round 5 hole 3.5: 0(15,3.5) 0(15,61.5) 0(108,3.5) 0(108,61.5)

## Via types
v1: diameter 0.762, hole 0.508, Top Layer to Bottom Layer, tented both sides, 331 vias
v2: diameter 1.016, hole 0.635, Top Layer to Bottom Layer, tented both sides, 61 vias
v3: diameter 0.6, hole 0.3, Top Layer to Bottom Layer, tented both sides, 49 vias
v4: diameter 0.508, hole 0.305, Top Layer to Bottom Layer, tented both sides, 44 vias

## Nets (pads, with @x,y where several pads share a name; then routed paths per layer and width w, separated by ;. In a path a pad name is that pad's centre, name@x,y a point inside that pad or via, vN(x,y) a via of type N, cw(c..) or ccw(c..) an arc to the next point about the centre after c; other vN are vias at no path point)
ADS_ALA: R14.1 U3.38 | length 11.3
  Top Layer w0.254: U3.38@73.85,22.35 83.006,22.35 84.405,23.749 R14.1@84.563,23.749
ADS_CSB: R12.1 U3.37 | length 11
  Top Layer w0.254: U3.37@73.85,21.85 83.433,21.85 84.083,22.5 84.542,22.5 R12.1@84.563,22.479
ADS_DRD: R7.1 U3.33 | length 11.7
  Top Layer w0.254: U3.33@73.85,19.85 80.461,19.85 82.912,17.399 R7.1@84.563,17.399
ADS_SCLK: R10.1 U3.34 | length 14.3
  Top Layer w0.254: U3.34@73.85,20.35 80.85,20.35 v3(82.785,18.415) ; v3(82.785,21.209) R10.1@84.563,21.209
  Bottom Layer w0.254: v3(82.785,18.415) v3(82.785,21.209)
ADS_SDI: R9.1 U3.36 | length 11.3
  Top Layer w0.254: U3.36@73.85,21.35 81.515,21.35 82.926,19.939 R9.1@84.563,19.939
ADS_SDO: R8.1 U3.35 | length 11.6
  Top Layer w0.254: U3.35@73.85,20.85 81.25,20.85 83.431,18.669 R8.1@84.563,18.669
AV3.3: C37.2 C38.2 C46.2 C47.2 C51.2 C52.2 C53.2 C54.2 C55.2 C56.1 R44.1 R49.3 TP8.1 U5.1 U6.8 U7.8 U8.7 U9.5 | length 25.5
  Top Layer w0.5: U5.1@55.023,61.982 v3(57.498,61.982) 58.506,61.982 ; v2@56.09,48.387 56.762,49.059 TP8.1@56.762,50.753 ; C47.2@58.506,61.276 58.506,61.982 ; C46.2@58.506,62.673 C46.2@58.506,62.621 58.506,61.982 ; C53.2@65.767,38.354 C52.2@67.037,38.354 U7.8@67.037,40.513 v3(67.037,42.164) ; U8.7@87.639,43.93 v3(89.299,43.93) 89.338,43.969 C37.2@89.338,47.752 ; U6.8@102.244,45.2 C54.2@105.038,45.2 C55.2@105.038,46.47 v3(105.038,47.462) ; C51.2@106.562,38.85 R44.1@106.562,40.12 v3@107.665,40.12
  other v1: 96.261,39.751 97.636,39.739
  other v2: 55.935,48.334
  other v3: 107.677,40.132
ECG_CLK: R18.1 U3.41 | length 18.3
  Top Layer w0.254: U3.41@73.85,23.85 75.505,23.85 75.741,23.613 v3(81.568,23.613)
  Top Layer w0.3: v3(82.023,15.875) R18.1@84.563,15.875
  Bottom Layer w0.3: v3(81.568,23.613) 81.568,16.33 v3(82.023,15.875)
EGND: C1.1 C2.2 C3.2 C4.2 C5.1 C6.1 C8.1 C9.1 C10.1 C11.1 C12.1 C13.2 C14.1 C15.2 C18.1 C19.1 C20.1 C21.1 C22.1 C23.2 C24.1 C25.2 C26.1 C27.1 C28.1 C29.1 C30.1 C31.1 C32.1 C33.2 C34.1 C37.1 C38.1 C39.2 C42.1 C43.2 C44.1 C45.1 C46.1 C47.1 C49.1 C50.2 C51.1 C52.1 C53.1 C54.1 C55.1 C56.2 C57.1 C58.1 C59.1 C60.2 C61.2 C62.2 C63.1 C64.1 C65.1 C66.2 C67.1 C68.1 C69.1 C70.1 C71.1 DS1.2 DS2.2 DS3.2 DS4.2 DS5.2 L2.3 LC1.2 LC2.2 LC3.2 P1.0 P1.4 P1.5 P3.0 P3.1 P3.4 P4.0 P4.1 P4.4 P5.0 P5.6 P6.0 P7.0 P8.0 P8.5 P8.6 Q1.3 Q2.3 R5.1 R6.1 R19.1 R24.2 R29.2 R30.2 R32.2 R36.2 R42.1 R45.1 R46.2 R49.1 SWD1.4 TP3.1 TVS1.1 TVS2.1 TVS3.1 TVS4.1 TVS5.1 TVS6.1 TVS7.1 TVS8.1 TVS9.1 U1.0 U1.14 U1.27 U2.2 U3.12 U3.18 U3.63 U4.2 U5.3 U5.8 U5.12 U6.4 U7.4 U8.4 U9.2 VR1.1 | length 41.5
  Top Layer w0.254: U3.12@62.75,21.85 65.318,21.85 ; v4(64.677,30.905) 65.05,30.532 U3.63@65.05,29.15 65.05,27.46 v1(66.475,26.035) ; U3.18@65.05,18.05 65.05,21.582 65.318,21.85 ; v1(66.583,23.115) 65.318,21.85 ; U1.14@90.175,21.6 90.175,20.55 U1.0@91.675,19.05 92.675,18.05 U1.27@92.675,16.5 ; C11.1@94.85,11.938 C12.1@96.12,11.938 ; TVS2.1@101.29,52.324 TVS2.1@101.29,52.67 ; 102.978,53.396 C59.1@102.978,54.358 ; C71.1@117.348,11.811 117.348,11.302 v4(117.999,10.651) ; C70.1@117.348,15.113 v4(118.129,15.113) ; C69.1@117.348,18.288 v4(118.129,18.288) ; C68.1@117.348,21.59 v4(118.129,21.59) ; C67.1@117.348,26.416 v4(117.348,28.406)
  Top Layer w0.5: C53.1@65.767,36.83 C52.1@66.701,36.83 ; v4(77.096,27.404) 77.832,28.14 C21.1@77.832,29.21 C18.1@77.832,30.48 C19.1@77.832,31.75 R32.2@77.832,33.02 ; v4(99.237,11.684) TVS6.1@100.02,11.684 ; v4(99.237,16.129) TVS7.1@100.02,16.129 ; v4(99.237,20.35) TVS8.1@100.02,20.35 ; v4(99.237,24.1) TVS9.1@100.02,24.1 ; LC3.2@99.45,34.913 U9.2@99.45,36.815 ; R45.1@106.562,41.39 C49.1@106.562,42.66
  other v1: 80.872,1.348 114.208,1.348 93.73,1.383 38.715,1.598 120.836,1.98 49.631,2.6 88.61,2.611 46.082,2.678 43.228,2.716 52.686,2.753 99.633,2.753 97.135,2.767 61.317,2.994 94.964,2.994 64.37,3.048 82.531,3.559 113.998,3.873 116.803,3.908 94.896,4.224 79.096,4.273 102.496,4.294 99.633,4.6 120.345,4.61 123.115,4.75 41.647,5.08 44.308,5.146 47.51,5.146 50.788,5.185 53.913,5.223 64.37,5.223 49.152,5.379 61.252,5.379 116.873,6.082 113.577,6.187 79.096,6.223 88.61,6.223 91.675,6.223 120.941,6.258 76.942,6.582 77.584,6.706 104.344,7.09 48.47,7.239 50.516,7.239 118.909,7.29 41.184,7.653 112.327,7.702 53.753,7.897 44.682,8.483 80.872,8.483 79.096,8.541 115.12,8.712 56.461,8.865 48.876,9.07 117.291,9.195 78.848,9.525 47.934,9.662 114.624,9.791 119.587,9.912 122.406,9.912 120.941,10.239 42.132,10.459 79.494,10.536 88.768,10.553 90.786,10.553 80.51,10.645 93.459,10.679 94.85,10.679 96.261,10.853 57.37,11.256 49.063,11.456 103.913,11.684 125.305,11.708 34.842,11.821 42.375,11.821 50.172,12.1 80.872,12.211 79.494,12.337 111.309,12.337 73.597,12.686 98.307,12.875 78.534,13.003 67.139,13.36 126.085,13.36 26.062,13.672 80.872,13.97 53.315,15.038 88.273,15.373 93.961,15.367 126.085,15.373 70.113,16.259 25.67,16.505 103.818,16.5 126.085,17.17 53.34,18.162 90.913,18.55 92.675,18.55 61.488,18.669 73.969,18.731 126.085,18.923 90.913,19.939 92.675,19.939 103.818,20.35 66.583,20.681 70.153,20.788 126.085,20.788 53.606,20.914 47.165,21.019 56.461,21.093 68.434,21.209 11.803,21.823 4.485,21.914 9.092,22.031 95.817,22.031 16.276,22.456 60.778,22.443 126.085,22.479 57.897,22.678 52.391,22.936 70.05,23.115 14.198,23.224 6.507,23.85 46.349,24.047 53.055,24.248 103.8,24.35 126.085,24.35 68.244,24.559 10.674,24.669 2.855,24.765 58.92,25.177 86.376,25.314 48.876,25.4 69.958,26.035 125.974,26.046 87.639,26.129 53.006,26.604 59.55,26.964 4.305,27.018 10.238,27.123 46.349,27.123 13.645,27.216 16.165,27.263 92.784,27.508 114.118,27.622 95.975,27.789 2.628,27.974 89.207,28.166 111.913,28.864 91.339,29.288 94.404,29.36 97.898,29.36 51.025,29.695 100.799,29.695 103.913,29.767 116.431,29.767 118.762,29.803 120.941,29.803 80.924,29.846 124.492,30.007 86.087,30.905 55.607,30.988 53.13,31.28 2.327,32.311 53.13,33.506 11.171,33.657 14.812,33.844 105.038,33.844 18.359,33.984 36.139,34.464 119.587,34.53 33.142,34.687 29.827,35.101 106.37,35.101 112.108,35.101 75.972,35.44 73.035,35.497 114.776,35.544 18.499,35.897 10.798,35.991 14.672,35.991 36.902,36.408 2.327,36.667 39.271,36.667 34.099,37.141 77.096,37.141 74.317,37.354 41.399,37.492 113.53,37.573 32.186,37.683 48.876,37.683 111.299,37.979 29.887,38.138 116.081,38.153 60.902,38.235 99.45,38.215 36.49,38.385 44.236,38.544 42.132,38.85 39.582,38.927 34.513,39.118 2.327,40.076 32.314,40.145 56.985,42.339 27.087,42.572 111.531,43.63 65.767,43.93 39.687,44.1 35.875,44.675 90.346,44.76 21.044,44.962 27.04,45.2 37.227,45.311 12.4,45.338 55.173,45.467 45.802,45.674 1.679,46.362 24.126,46.691 61.355,46.933 35.764,47.684 11.498,47.743 27.04,47.846 30.074,47.939 106.37,47.939 111.483,47.939 54.113,48.387 50.833,48.477 3.6,48.523 95.975,48.73 104.344,48.73 61.488,49.104 87.796,49.252 90.913,49.252 17.661,49.698 79.494,49.698 34.462,49.758 45.558,49.753 22.786,49.865 15,49.911 75.864,50.016 80.974,50.378 72.042,50.546 54.075,50.753 5.259,50.9 12.7,50.975 8.321,51.004 110.024,51.252 69.613,52.026 16.964,52.124 51.162,52.324 65.983,52.638 94.896,52.99 45.306,53.15 54.289,53.15 56.762,53.208 114.226,53.57 14.354,53.907 23.675,53.982 3.906,54.208 62.447,54.287 9.092,54.358 44.236,54.358 33.058,55.111 63.282,55.236 108.33,55.276 37.653,55.596 82.862,55.848 85.836,55.908 111.203,56.194 117.79,56.265 45.076,56.344 61.841,56.525 51.896,56.821 8.854,57.15 115.878,57.482 22.882,57.632 38.081,57.658 4.08,58.126 119.64,58.206 20.116,59.158 51.986,59.682 53.375,60.357 41.647,61.619 29.421,62.328 19.198,62.621
  other v2: 85.928,1.533 69.491,2.295 72.822,4.463 45.379,10.239 27.933,20.196 74.905,29.087 32.061,31.978 28.328,32.079 38.897,34.274 123.115,34.29 90.532,35.25 71.777,37.354 59.051,41.021 84.946,42.013 99.633,42.164 56.762,44.467 84.704,44.467 23.077,44.742 7.355,44.889 4.045,44.913 16.574,46.662 56.762,46.933 46.695,47.939 65.318,49.152 73.969,50.272 61.96,50.492 63.8,51.004 89.599,52.329 61.629,52.572 63.709,52.997 110.926,54.013
  other v4: 106.562,42.025
EVDD: C9.2 C10.2 C11.2 C12.2 C14.2 C15.1 FB2.2 R21.1 R23.1 TP4.1 U1.22 U1.28 | length 29.4
  Top Layer w0.254: TP4.1@82.785,13.835 86.648,13.835 87.021,13.462 C9.2@89.77,13.462 ; U1.22@90.175,16.5 v3(90.175,15.367) 90.175,13.486 90.151,13.462 C10.2@91.04,13.462 ; U1.28@93.175,16.5 93.193,16.482 v1(95.731,16.482) ; C11.2@94.85,13.462 94.85,15.601 v1(95.731,16.482) ; C12.2@96.12,13.462 96.12,16.129 95.749,16.5 v1(95.731,16.482)
  Top Layer w0.4: R21.1@89.897,25.527 v3(89.897,26.803)
  Top Layer w0.508: v4@92.31,11.157 R23.1@92.31,11.938
  Bottom Layer w0.254: v1(97.009,8.763) 99.239,8.763 100.851,7.151 100.851,4.546
  other v1: 95.577,8.747 94.225,8.763 97.135,10.022
  other v4: 92.312,11.114
GND_IN: L2.4 P2.1 P2.2 pad.0@15,3.5
  other v1: 21.866,1.261 19.229,1.29 3.087,2.043 6.246,2.043 8.941,2.101 10.883,2.246 22.475,3.492 19.691,3.559 2.942,4.75 8.854,4.941 6.507,5.057 20.214,5.521 10.941,5.84 18.07,6.593 2.855,7.653 9.521,7.752 6.188,7.897 12.564,8.071 15.896,8.1 2.942,10.39 6.333,10.853 12.245,11.114 9.521,11.256 3.058,12.94 6.217,13.317 9.926,13.838 11.868,15.345 2.855,16.301 10.245,17.924
MMR_CS: U3.55 U5.5 | length 45.2
  Top Layer w0.254: U5.5@49.818,59.752 48.727,59.752 48.092,59.117 48.092,45.742 59.998,33.836 67.714,33.836 69.057,32.493 U3.55@69.057,29.15
MMR_DIN: U3.53 U5.4 | length 52.5
  Top Layer w0.254: v3(46.695,51.37) 46.695,61.124 47.553,61.982 U5.4@51.213,61.982 ; v4(49.152,51.367) 49.152,46.305 60.713,34.744 61.331,34.744 ; 61.331,34.779 68.471,34.779 70.05,33.2 U3.53@70.05,29.15
  Bottom Layer w0.254: v3(46.695,51.37) 49.15,51.37 v4(49.152,51.367)
MMR_DO: U3.52 U5.7 | length 41.3
  Top Layer w0.254: U5.7@49.818,57.212 49.818,46.483 61.068,35.233 69.049,35.233 70.55,33.732 U3.52@70.55,29.15
MMR_RD: U3.54 U5.6 | length 43.6
  Top Layer w0.254: U5.6@49.818,58.482 48.854,58.482 48.571,58.199 48.571,46.025 60.306,34.29 67.979,34.29 69.557,32.712 U3.54@69.557,29.15
MMR_SCLK: U3.51 U5.9 | length 38.3
  Top Layer w0.254: U5.9@52.483,55.182 52.483,44.829 61.576,35.736 61.576,35.687 69.473,35.687 71.05,34.11 U3.51@71.05,29.15
MOTOR: C17.2 R28.2 U3.61 | length 30.9
  Top Layer w0.254: C17.2@43.716,41.167 43.726,41.167 R28.2@43.726,42.437 50.35,42.437 59.436,33.35 64.965,33.35 66.057,32.258 U3.61@66.057,29.15
NetC1_2: C1.2 C2.1 FB4.2 TP1.1 VR1.3 | length 8.8
  Top Layer w0.254: FB4.2@27.087,23.979 TP1.1@27.087,27.719
  Top Layer w1.016: C2.1@30.715,18.875 C1.2@30.715,21.6 VR1.3@30.715,23.921